# Altium PCB PCB_magnetometer.pcbdoc
Units mm, origin at the board's own origin, x right, y up, seen from the top; angles counter-clockwise.
Board outline 345.31 x 137.16 mm, 2 copper layers (Top Layer, Bottom Layer); 30 components, 31 nets, 194 pads, 0 vias.
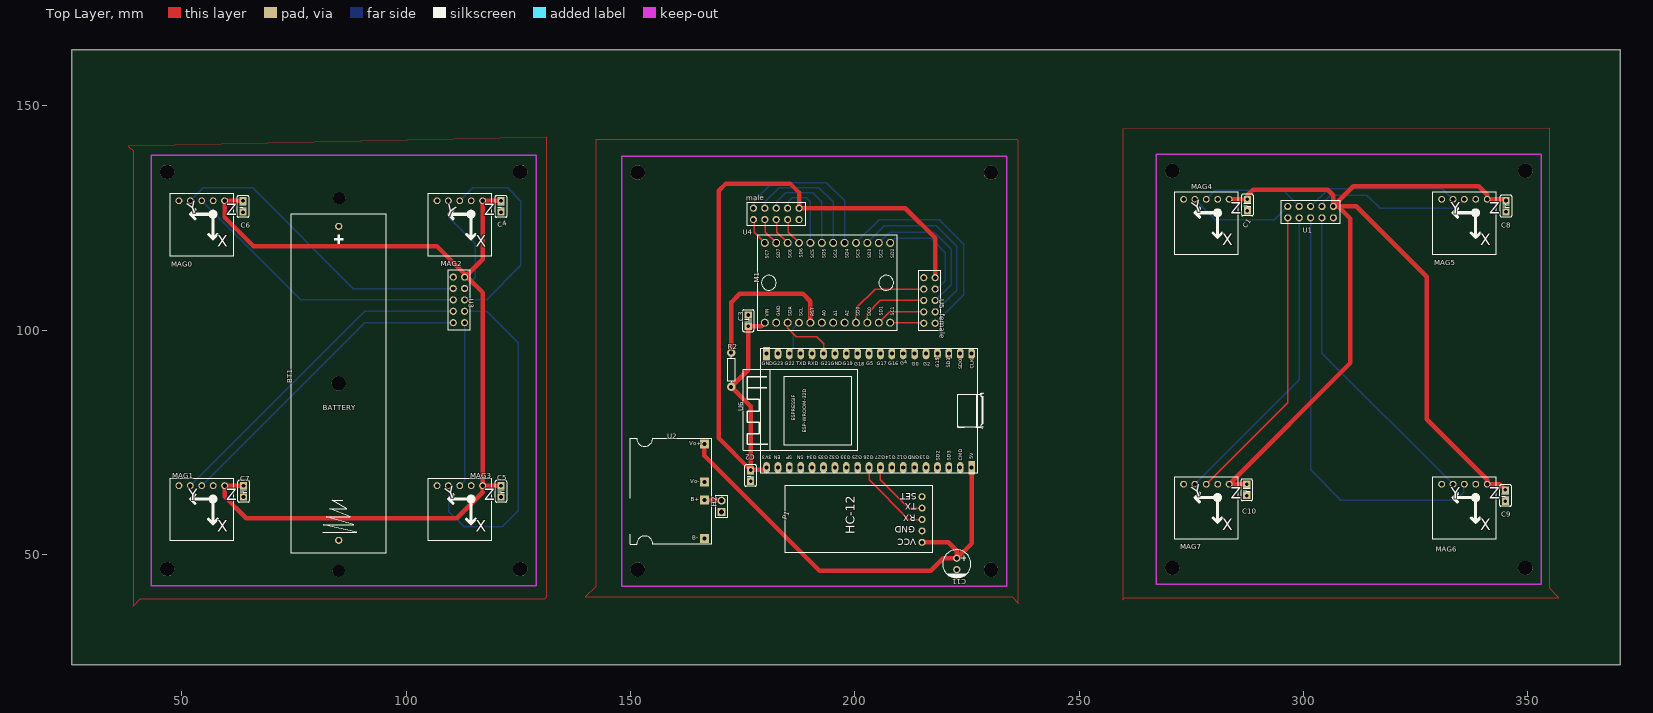
[diagram p0: Top Layer view]
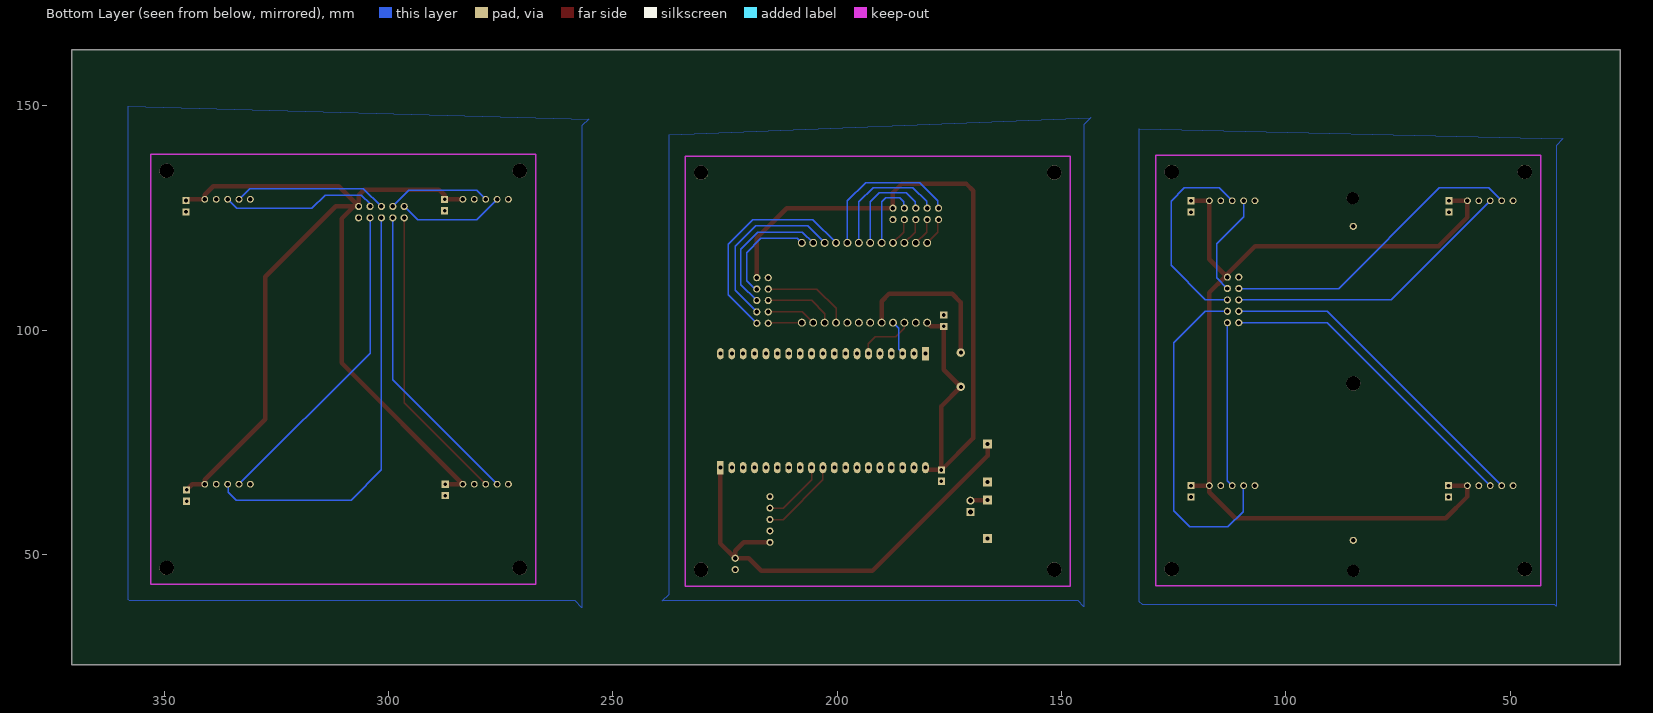
[diagram p1: Bottom Layer view, seen from below]

## Layer stack, top to bottom
Top Layer: signal copper (thickness not stored)
Dielectric: dielectric 0.32, FR-4, Dk 4.8
Bottom Layer: signal copper (thickness not stored)

## Board outline
370.713,25.4 25.4,25.4 25.4,162.56 370.713,162.56

## Components (designator, comment, footprint, x,y, rotation, side; value= is the part's Value field where it differs from the comment)
BT1 "BH-18650-1" BAT-TH_BH-18650-A1AJ005 84.963,88.138 r90 top
C1 "220nF" C0.1PTH 287.528,127.889 r270 top
C2 "220nF" C0.1PTH 176.784,67.564 r270 top
C3 "220nF" C0.1PTH 176.276,102.108 r90 top
C4 "220nF" C0.1PTH 121.16,127.573 r270 top
C5 "220nF" C0.1PTH 121.16,64.073 r270 top
C6 "220nF" C0.1PTH 63.629,127.573 r270 top
C7 "220nF" C0.1PTH 63.756,64.073 r270 top
C8 "220nF" C0.1PTH 345.186,127.635 r270 top
C9 "220nF" C0.1PTH 345.059,63.119 r270 top
C10 "220nF" C0.1PTH 287.401,64.389 r270 top
C11 "100uF" CAP-TH_BD6.3-P2.50-D1.0-FD 222.758,47.879 r270 top
H2 "HDR1X2" HDR-TH_2P-P2.54-V-M-1 170.307,60.706 r90 top
M1 "multiplexer" S.MOD.TCA9548A 179.961,101.665 r90 top
MAG0 "QMC5883L X-Y-Z" "QMC5883L X-Y-Z" 54.434,128.843 r180 top
MAG1 "QMC5883L X-Y-Z" "QMC5883L X-Y-Z" 54.434,65.343 r180 top
MAG2 "QMC5883L X-Y-Z" "QMC5883L X-Y-Z" 111.965,128.843 r180 top
MAG3 "QMC5883L X-Y-Z" "QMC5883L X-Y-Z" 111.965,65.343 r180 top
MAG4 "QMC5883L X-Y-Z" "QMC5883L X-Y-Z" 278.384,129.159 r180 top
MAG5 "QMC5883L X-Y-Z" "QMC5883L X-Y-Z" 335.915,129.159 r180 top
MAG6 "QMC5883L X-Y-Z" "QMC5883L X-Y-Z" 335.915,65.659 r180 top
MAG7 "QMC5883L X-Y-Z" "QMC5883L X-Y-Z" 278.384,65.659 r180 top
P1 "HC-12" HC-12 215.011,52.705 r90 top
R2 "1kΩ" R_AXIAL-0.3 172.466,91.186 r270 top
U1 "HDR2X5-2.54" HDR-TH_10P_C9900008731 301.625,126.303 r180 top
U2 "LX-LCBST" LX-LCBST 148.717,55.245 r0 top
U3 "HDR2X5-2.54" HDR-TH_10P_C9900008731 111.762,106.741 r270 top
U4 "HDR2X5-2.54" HDR-TH_10P_C9900008731 182.501,125.922 r180 top
U5 "HDR2X5-2.54" HDR-TH_10P_C9900008731 216.664,106.614 r270 top
U6 "ESP32 DevKitC V4 WROOM 32D" "ESP32-WROOM-32D MODULE" 205.105,82.423 r90 top

## Footprints (in the part's own frame and the unit in brackets; to place one, negate y for a bottom-side part, rotate by r counter-clockwise, add the part's x,y. Pads: shape width x height; smd on the part's side, far side on the other; paste and mask are expansions set on the pad)
BAT-TH_BH-18650-A1AJ005 [mm]
  round 1.6 hole 1.02 paste+0 mask+0.051: 1(-35,0) 2(35,0)
  round 3.2 hole 3.2 unplated paste+0: ""(0,0)
  silkscreen extent -37.85,-10.54 37.85,10.54
C0.1PTH [mil]
  rect 63x63 hole 32 paste+0 mask+2: 1(-50,0) 2(50,0)
  silkscreen extent -95,-50 95,50
CAP-TH_BD6.3-P2.50-D1.0-FD [mm]
  round 1.6 hole 1 paste+0 mask+0.051: 1(-1.27,0) 2(1.27,0)
  silkscreen extent -3.15,-3.15 3.17,3.15
"ESP32-WROOM-32D MODULE" [mm]
  oval 2.5x1.5 hole 0.9 paste+0 mask+0.102: 1(-13.081,24.765) 2(-13.081,22.225) 3(-13.081,19.685) 4(-13.081,17.145) 5(-13.081,14.605) 6(-13.081,12.065) 7(-13.081,9.525) 8(-13.081,6.985) 9(-13.081,4.445) 10(-13.081,1.905) 11(-13.081,-0.635) 12(-13.081,-3.175) 13(-13.081,-5.715) 14(-13.081,-8.255) 15(-13.081,-10.795) 16(-13.081,-13.335) 17(-13.081,-15.875) 18(-13.081,-18.415) 21(12.319,22.225) 22(12.319,19.685) 23(12.319,17.145) 24(12.319,14.605) 25(12.319,12.065) 26(12.319,9.525) 27(12.319,6.985) 28(12.319,4.445) 29(12.319,1.905) 30(12.319,-0.635) 31(12.319,-3.175) 32(12.319,-5.715) 33(12.319,-8.255) 34(12.319,-10.795) 35(12.319,-13.335) 36(12.319,-15.875) 37(12.319,-18.415) 38(12.319,-20.955)
  rect 3x1.5 hole 0.9 paste+0 mask+0.102: 19(-13.081,-20.955) 20(12.319,24.765)
  silkscreen extent -14.35,-23.52 13.59,29.97
HC-12 [mm]
  round 1.57 hole 0.89 paste+0 mask+0.051: 1(0,0) 2(2.54,0) 3(5.08,0) 4(7.62,0) 5(10.16,0)
  silkscreen extent -2.29,-2.29 12.7,30.48
HDR-TH_2P-P2.54-V-M-1 [mm]
  rect 1.8x1.8 hole 1.1 paste+0 mask+0.051: 1(-1.27,0)
  round 1.8 hole 1.1 paste+0 mask+0.051: 2(1.27,0)
  silkscreen extent -2.54,-1.27 2.54,1.27
HDR-TH_10P_C9900008731 [mm]
  round 1.6 hole 1 paste+0 mask+0.05: 1(-5.08,-1.27) 2(-5.08,1.27) 3(-2.54,-1.27) 4(-2.54,1.27) 5(0,-1.27) 6(0,1.27) 7(2.54,-1.27) 8(2.54,1.27) 9(5.08,-1.27) 10(5.08,1.27)
  silkscreen extent -6.6,-2.5 6.6,2.5
LX-LCBST [mm]
  rect 2x2 hole 0.9 paste+0 mask+0.051: B+(17.78,6.849) B-(17.78,-1.651) Vo+(17.78,19.349) Vo-(17.78,10.849)
  silkscreen extent 1.28,-2.95 19.28,20.65
"QMC5883L X-Y-Z" [mil]
  round 60 hole 40 paste+0 mask+2: 1(-200,0) 2(-100,0) 3(0,0) 4(100,0) 5(200,0)
  silkscreen extent -275,-66 276,485
R_AXIAL-0.3 [mil]
  round 74 hole 35.4 paste+0 mask+2: 1(-150,0) 2(150,0)
  silkscreen extent -110,-30 110,30
S.MOD.TCA9548A [mil]
  round 70 hole 47 paste+0 mask+4: 1(0,0) 2(0,-100) 3(0,-200) 4(0,-300) 5(0,-400) 6(0,-500) 7(0,-600) 8(0,-700) 9(0,-800) 10(0,-900) 11(0,-1000) 12(0,-1100) 13(700,-1100) 14(700,-1000) 15(700,-900) 16(700,-800) 17(700,-700) 18(700,-600) 19(700,-500) 20(700,-400) 21(700,-300) 22(700,-200) 23(700,-100) 24(700,0)
  silkscreen extent -70,-1160 770,60

## Free pads (board coordinates)
  round 3.2 hole 3.2 unplated paste+0: ""(46.736,46.736) ""(46.736,135.255) ""(125.476,46.736) ""(125.476,135.255) ""(151.638,46.609) ""(151.638,135.128) ""(230.378,46.609) ""(230.378,135.128) ""(270.764,46.99) ""(270.764,135.509) ""(349.504,46.99) ""(349.504,135.509)
  round 2.7 hole 2.7 unplated paste+0: ""(84.963,46.355) ""(85.09,129.413)

## Nets (pads, with @x,y where several pads share a name; then routed paths per layer and width w, separated by ;. In a path a pad name is that pad's centre, name@x,y a point inside that pad or via, vN(x,y) a via of type N, cw(c..) or ccw(c..) an arc to the next point about the centre after c; other vN are vias at no path point)
3.3V: C1.1 C2.1 C3.1 C4.1 C5.1 C6.1 C7.1 C8.1 C9.1 C10.1 M1.1 MAG0.1 MAG1.1 MAG2.1 MAG3.1 MAG4.1 MAG5.1 MAG6.1 MAG7.1 R2.2 U1.1 U3.2 U4.1 U5.2 U6.1 | length 618.7
  Top Layer w1: MAG1.1 C7.1 ; MAG1.1 59.515,62.913 64.389,58.039 111.252,58.039 117.046,63.833 MAG3.1 117.046,108.379 113.604,111.821 U3.2 ; MAG0.1 C6.1 ; MAG0.1 59.515,125.143 65.913,118.745 106.807,118.745 113.033,112.519 U3.2 ; MAG3.1 C5.1 ; C4.1 MAG2.1 117.045,115.834 U3.2 ; M1.1 179.134,100.838 C3.1 176.276,91.186 R2.2 176.784,83.058 C2.1 ; U6.1 179.832,68.834 C2.1 ; U5.2 217.935,120.52 211.262,127.193 U4.1 187.582,130.68 185.674,132.588 171.196,132.588 169.672,131.064 169.672,75.946 C2.1 ; MAG4.1 C1.1 287.528,130.048 288.798,131.318 305.435,131.318 306.705,130.048 U1.1@306.705,127.635 ; C10.1 MAG7.1 310.515,92.71 310.515,124.841 307.721,127.635 U1.1@306.705,127.635 ; C9.1 343.789,65.659 MAG6.1 340.995,66.675 327.533,80.137 327.533,111.887 311.785,127.635 U1.1@306.705,127.635 ; C8.1 344.932,129.159 MAG5.1 340.995,130.175 339.09,132.08 311.15,132.08 U1.1@306.705,127.635
+5V: C11.1 P1.1 U2.Vo+ U6.19 | length 102.4
  Top Layer w1: U2.Vo+ 166.497,72.009 192.151,46.355 216.916,46.355 219.71,49.149 C11.1 ; P1.1 220.853,52.705 222.758,50.8 C11.1 ; U6.19 226.06,52.451 C11.1
BAT+: BT1.2 H2.1
BAT-: BT1.1 U2.B-
GND: C1.2 C2.2 C3.2 C4.2 C5.2 C6.2 C7.2 C8.2 C9.2 C10.2 C11.2 M1.2 M1.6 M1.7 M1.8 MAG0.2 MAG1.2 MAG2.2 MAG3.2 MAG4.2 MAG5.2 MAG6.2 MAG7.2 P1.2 U1.2 U2.Vo- U3.1 U4.2 U5.1 U6.14 U6.20 U6.26
M1_3: M1.3 U6.25 | length 12.7
  Top Layer w0.3: M1.3 185.041,100.395 186.946,98.49 191.518,98.49 193.089,96.918 U6.25@193.089,94.934
M1_4: M1.4 U6.22 | length 7.6
  Bottom Layer w0.3: U6.22@185.469,94.934 186.311,95.775 186.311,100.395 M1.4
M1_5: M1.5 R2.1 | length 35.1
  Top Layer w1: R2.1 172.466,106.172 174.371,108.077 188.468,108.077 190.122,106.423 M1.5
P1_3: P1.3 U6.10 | length 18.2
  Top Layer w0.3: U6.10 203.2,66.675 212.09,57.785 P1.3
P1_4: P1.4 U6.11 | length 14.6
  Top Layer w0.3: U6.11 205.74,66.675 212.09,60.325 P1.4
S$19716: 
S$19723: 
S$19727: 
S$19734: 
SCL_0: M1.10 MAG0.3 U3.5 U5.5 | length 81
  Top Layer w0.3: M1.10 202.821,103.697 205.738,106.614 U5.5
  Bottom Layer w0.3: MAG0.3 76.536,106.741 U3.5
SCL_1: M1.12 MAG1.3 U3.9 U5.9 | length 78.6
  Top Layer w0.3: M1.12 215.263,101.665 U5.9
  Bottom Layer w0.3: MAG1.3 90.752,101.661 U3.9
SCL_2: M1.14 MAG2.3 U3.6 U5.6 | length 77.7
  Bottom Layer w0.3: MAG2.3 114.821,131.699 122.682,131.699 125.603,128.778 125.603,114.427 117.917,106.741 U3.6 ; M1.14 207.774,121.858 217.68,121.858 221.49,118.048 221.49,110.17 U5.6
SCL_3: M1.16 MAG3.3 U3.10 U5.10 | length 85.5
  Bottom Layer w0.3: MAG3.3 113.032,66.41 U3.10 ; M1.16 205.488,124.652 218.823,124.652 224.284,119.191 224.284,107.884 U5.10
SCL_4: M1.18 MAG4.3 U1.7 U4.7 | length 51.4
  Bottom Layer w0.3: U4.7@180.088,127.192 180.088,128.716 183.136,131.764 192.026,131.764 195.201,128.589 M1.18 ; MAG4.3 280.416,131.191 295.529,131.191 U1.7@299.085,127.635
SCL_5: M1.20 MAG5.3 U1.3 U4.3 | length 51.4
  Bottom Layer w0.3: U4.3@185.168,127.192 185.168,128.589 186.057,129.478 189.232,129.478 190.121,128.589 M1.20 ; U1.3@304.166,127.636 304.166,128.208 306.068,130.11 314.135,130.11 317.12,127.128 333.884,127.128 MAG5.3
SCL_6: M1.22 MAG6.3 U1.6 U4.6 | length 101.9
  Top Layer w0.3: U4.6@182.628,124.652 182.628,121.858 M1.22
  Bottom Layer w0.3: U1.6@301.625,124.968 301.625,68.834 308.356,62.103 334.01,62.103 335.788,63.881 335.788,65.532 MAG6.3
SCL_7: M1.24 MAG7.3 U1.10 U4.10 | length 73.2
  Top Layer w0.3: U4.10@177.548,124.652 177.548,121.858 M1.24 ; MAG7.3 296.545,83.82 U1.10@296.545,125.095
SDA_0: M1.9 MAG0.4 U3.3 U5.3 | length 89.1
  Top Layer w0.3: M1.9 200.281,104.84 204.595,109.154 U5.3
  Bottom Layer w0.3: MAG0.4 54.75,131.699 65.786,131.699 88.204,109.281 U3.3
SDA_1: M1.11 MAG1.4 U3.7 U5.7 | length 85.7
  Top Layer w0.3: M1.11 207.77,104.074 U5.7
  Bottom Layer w0.3: MAG1.4 90.752,104.201 U3.7
SDA_2: M1.13 MAG2.4 U3.4 U5.4 | length 46.4
  Bottom Layer w0.3: MAG2.4 109.426,125.27 115.443,119.253 115.443,111.691 U3.4 ; M1.13 208.917,120.461 217.045,120.461 220.22,117.286 220.22,111.063 218.311,109.154 U5.4
SDA_3: M1.15 MAG3.4 U3.8 U5.8 | length 116.5
  Bottom Layer w0.3: MAG3.4 109.474,65.293 109.474,59.563 112.903,56.134 121.412,56.134 124.968,59.69 124.968,97.155 117.922,104.201 U3.8 ; M1.15 206.631,123.255 218.188,123.255 222.76,118.683 222.76,108.9 U5.8
SDA_4: M1.17 MAG4.4 U1.9 U4.9 | length 58.5
  Bottom Layer w0.3: U4.9@177.548,127.192 177.548,128.843 181.612,132.907 193.677,132.907 197.741,128.843 M1.17 ; MAG4.4 280.416,124.587 293.497,124.587 U1.9@296.545,127.635
SDA_5: M1.19 MAG5.4 U1.5 U4.5 | length 56.7
  Bottom Layer w0.3: U4.5@182.628,127.192 182.628,128.589 184.66,130.621 190.629,130.621 192.661,128.589 M1.19 ; U1.5 305.623,131.572 330.962,131.572 MAG5.4
SDA_6: M1.21 MAG6.4 U1.4 U4.4 | length 77.7
  Top Layer w0.3: U4.4@185.168,124.652 185.168,121.858 M1.21
  Bottom Layer w0.3: U1.4@304.165,125.095 304.165,94.869 MAG6.4
SDA_7: M1.23 MAG7.4 U1.8 U4.8 | length 75.3
  Top Layer w0.3: U4.8@180.088,124.652 180.088,121.858 M1.23
  Bottom Layer w0.3: MAG7.4 299.085,88.9 U1.8@299.085,125.095
U2_B+: H2.2 U2.B+ | length 3.9
  Top Layer w1: U2.B+ 170.189,62.094 H2.2
pads on no net: BT1. MAG0.5 MAG1.5 MAG2.5 MAG3.5 MAG4.5 MAG5.5 MAG6.5 MAG7.5 P1.5 U6.2 U6.3 U6.4 U6.5 U6.6 U6.7 U6.8 U6.9 U6.12 U6.13 U6.15 U6.16 U6.17 U6.18 U6.21 U6.23 U6.24 U6.27 U6.28 U6.29 U6.30 U6.31 U6.32 U6.33 U6.34 U6.35 U6.36 U6.37 U6.38

## Polygon pours and split planes (outlines as drawn)
GND on Bottom Layer (solid): 38.227,142.621 39.751,141.097 39.751,38.481 40.005,38.735 131.953,38.735 132.715,39.497 132.715,144.907
GND on Bottom Layer (solid): 143.51,147.32 145.034,145.796 145.034,38.354 146.304,39.624 239.014,39.624 237.49,41.148 237.49,143.51
GND on Bottom Layer (solid): 255.397,147.066 256.921,145.542 256.921,38.1 258.445,39.624 357.759,39.624 358.013,39.878 358.013,149.86
GND on Top Layer (solid): 38.1,140.97 39.116,139.954 39.116,38.481 40.767,40.132 130.937,40.132 131.318,40.513 131.318,143.002
GND on Top Layer (solid): 259.715,144.78 259.715,39.878 260.223,40.386 356.997,40.386 354.965,42.418 354.965,145.034
GND on Top Layer (solid): 142.24,142.494 142.24,42.799 139.954,40.513 235.077,40.513 236.474,39.116 236.474,142.24 236.22,142.494

## Silkscreen, mask and mechanical layers (free items; w line width, h text height)
Top Overlay:
  text "male" at 175.788,128.842 h1.14 r2
  text "female" at 219.011,103.632 h1.14 r270
  text "BATTERY" at 81.407,82.105 h1.14

## Text inside footprints (layer, text, board x,y; h text height)
M1: Top Overlay "SC7" at 180.85,115.889 h0.76 r90; Top Overlay "SD7" at 183.39,116.016 h0.76 r90; Top Overlay "SC6" at 185.93,116.016 h0.76 r90; Top Overlay "SD6" at 188.47,116.143 h0.76 r90; Top Overlay "SC5" at 191.01,116.016 h0.76 r90; Top Overlay "SD5" at 193.55,116.016 h0.76 r90; Top Overlay "SC4" at 196.09,116.016 h0.76 r90; Top Overlay "SD4" at 198.63,116.016 h0.76 r90; Top Overlay "SC3" at 201.17,116.016 h0.76 r90; Top Overlay "SD3" at 203.71,116.016 h0.76 r90; Top Overlay "SC2" at 206.25,116.016 h0.76 r90; Top Overlay "SD2" at 208.79,116.016 h0.76 r90; Top Overlay "SC1" at 208.79,103.189 h0.76 r90; Top Overlay "SD1" at 206.25,103.189 h0.76 r90; Top Overlay "SC0" at 203.71,103.062 h0.76 r90; Top Overlay "SD0" at 201.17,103.062 h0.76 r90; Top Overlay "A2" at 198.63,103.062 h0.76 r90; Top Overlay "A1" at 196.09,103.062 h0.76 r90; Top Overlay "A0" at 193.55,103.062 h0.76 r90; Top Overlay "RST" at 191.01,103.062 h0.76 r90; Top Overlay "SCL" at 188.47,103.062 h0.76 r90; Top Overlay "SDA" at 185.93,103.062 h0.76 r90; Top Overlay "GND" at 183.39,103.062 h0.76 r90; Top Overlay "VIN" at 180.85,102.935 h0.76 r90
MAG0: Top Overlay "X" at 57.934,118.593 h2.5; Top Overlay "Y" at 51.882,125.676 h2.5 r21; Top Overlay "Z" at 59.934,125.593 h2.5
MAG1: Top Overlay "X" at 57.934,55.093 h2.5; Top Overlay "Y" at 51.434,62.093 h2.5; Top Overlay "Z" at 59.934,62.093 h2.5
MAG2: Top Overlay "X" at 115.465,118.593 h2.5; Top Overlay "Y" at 108.517,125.676 h2.5 r339; Top Overlay "Z" at 117.465,125.593 h2.5
MAG3: Top Overlay "X" at 115.465,55.093 h2.5; Top Overlay "Y" at 109.413,62.176 h2.5 r21; Top Overlay "Z" at 117.465,62.093 h2.5
MAG4: Top Overlay "X" at 281.884,118.909 h2.5; Top Overlay "Y" at 275.832,125.992 h2.5 r21; Top Overlay "Z" at 283.884,125.909 h2.5
MAG5: Top Overlay "X" at 339.415,118.909 h2.5; Top Overlay "Y" at 332.915,125.909 h2.5; Top Overlay "Z" at 341.415,125.909 h2.5
MAG6: Top Overlay "X" at 339.415,55.409 h2.5; Top Overlay "Y" at 332.915,62.409 h2.5; Top Overlay "Z" at 341.415,62.409 h2.5
MAG7: Top Overlay "X" at 281.884,55.409 h2.5; Top Overlay "Y" at 275.832,62.492 h2.5 r21; Top Overlay "Z" at 283.884,62.409 h2.5
P1: Top Overlay "VCC" at 213.713,53.511 h1.5 r180; Top Overlay "GND" at 213.51,56.305 h1.5 r180; Top Overlay "RX" at 213.561,58.845 h1.5 r180; Top Overlay "TX" at 213.815,61.385 h1.5 r180; Top Overlay "SET" at 213.881,63.671 h1.5 r180
U2: Document "type-C" at 153.477,55.132 h1.2 r90; Document "USB" at 151.797,56.694 h1.2 r90; Top Overlay "B+" at 163.418,61.482 h1.5; Top Overlay "B-" at 163.799,52.973 h1.5; Top Overlay "Vo-" at 163.291,65.546 h1.5 r359; Top Overlay "Vo+" at 163.164,74.055 h1.5 r359
U6: Top Overlay "3V3" at 181.489,71.953 h0.8 r180; Top Overlay "EN" at 183.491,71.953 h0.8 r180; Top Overlay "SP" at 186.049,71.953 h0.8 r180; Top Overlay "SN" at 188.589,71.953 h0.8 r180; Top Overlay "G34" at 191.54,71.953 h0.8 r180; Top Overlay "G35" at 194.062,71.953 h0.8 r180; Top Overlay "G32" at 196.583,71.953 h0.8 r180; Top Overlay "G33" at 199.142,71.953 h0.8 r180; Top Overlay "G25" at 201.682,71.953 h0.8 r180; Top Overlay "G26" at 204.203,71.953 h0.8 r180; Top Overlay "G27" at 206.762,71.953 h0.8 r180; Top Overlay "G14" at 209.156,71.953 h0.8 r180; Top Overlay "G12" at 211.679,71.953 h0.8 r180; Top Overlay "GND" at 214.37,71.953 h0.8 r180; Top Overlay "G13" at 216.759,71.953 h0.8 r180; Top Overlay "SD2" at 218.94,70.842 h0.8 r90; Top Overlay "SD3" at 221.435,70.842 h0.8 r90; Top Overlay "CMD" at 223.975,70.842 h0.8 r90; Top Overlay "5V" at 226.46,71.247 h0.8 r90; Top Overlay "ESP-WROOM-32D" at 189.249,77.089 h0.8 r90; Top Overlay "GND" at 179.318,92.202 h0.8; Top Overlay "G23" at 181.858,92.202 h0.8; Top Overlay "G22" at 184.398,92.202 h0.8; Top Overlay "TXD" at 187.019,92.202 h0.8; Top Overlay "RXD" at 189.497,92.202 h0.8; Top Overlay "G21" at 192.454,92.202 h0.8; Top Overlay "GND" at 194.673,92.128 h0.8; Top Overlay "G19" at 197.34,92.128 h0.8; Top Overlay "G18" at 199.898,92.056 h0.8; Top Overlay "G5" at 202.552,92.128 h0.8; Top Overlay "G17" at 204.896,92.128 h0.8; Top Overlay "G16" at 207.5,92.128 h0.8; Top Overlay "G4" at 210.27,92.142 h0.8 r15; Top Overlay "G0" at 212.712,92.075 h0.8; Top Overlay "G2" at 215.252,92.075 h0.8; Top Overlay "G15" at 218.895,91.65 h0.8 r90; Top Overlay "SD1" at 221.34,91.65 h0.8 r90; Top Overlay "SD0" at 223.975,91.322 h0.8 r90; Top Overlay "CLK" at 226.515,91.357 h0.8 r90; Top Overlay "ESPRESSIF" at 186.709,79.756 h0.8 r90